# Altium PCB PCB08072018.PcbDoc
Units mm, origin at the board's own origin, x right, y up, seen from the top; angles counter-clockwise.
Board outline 60.25 x 30.25 mm, 4 copper layers (Top Layer, LayerGND, LayerVCC, Bottom Layer), stack 1.49 mm thick; 55 components, 33 nets, 213 pads, 2 vias.
Unrouted connection lines stored in the file: 128.
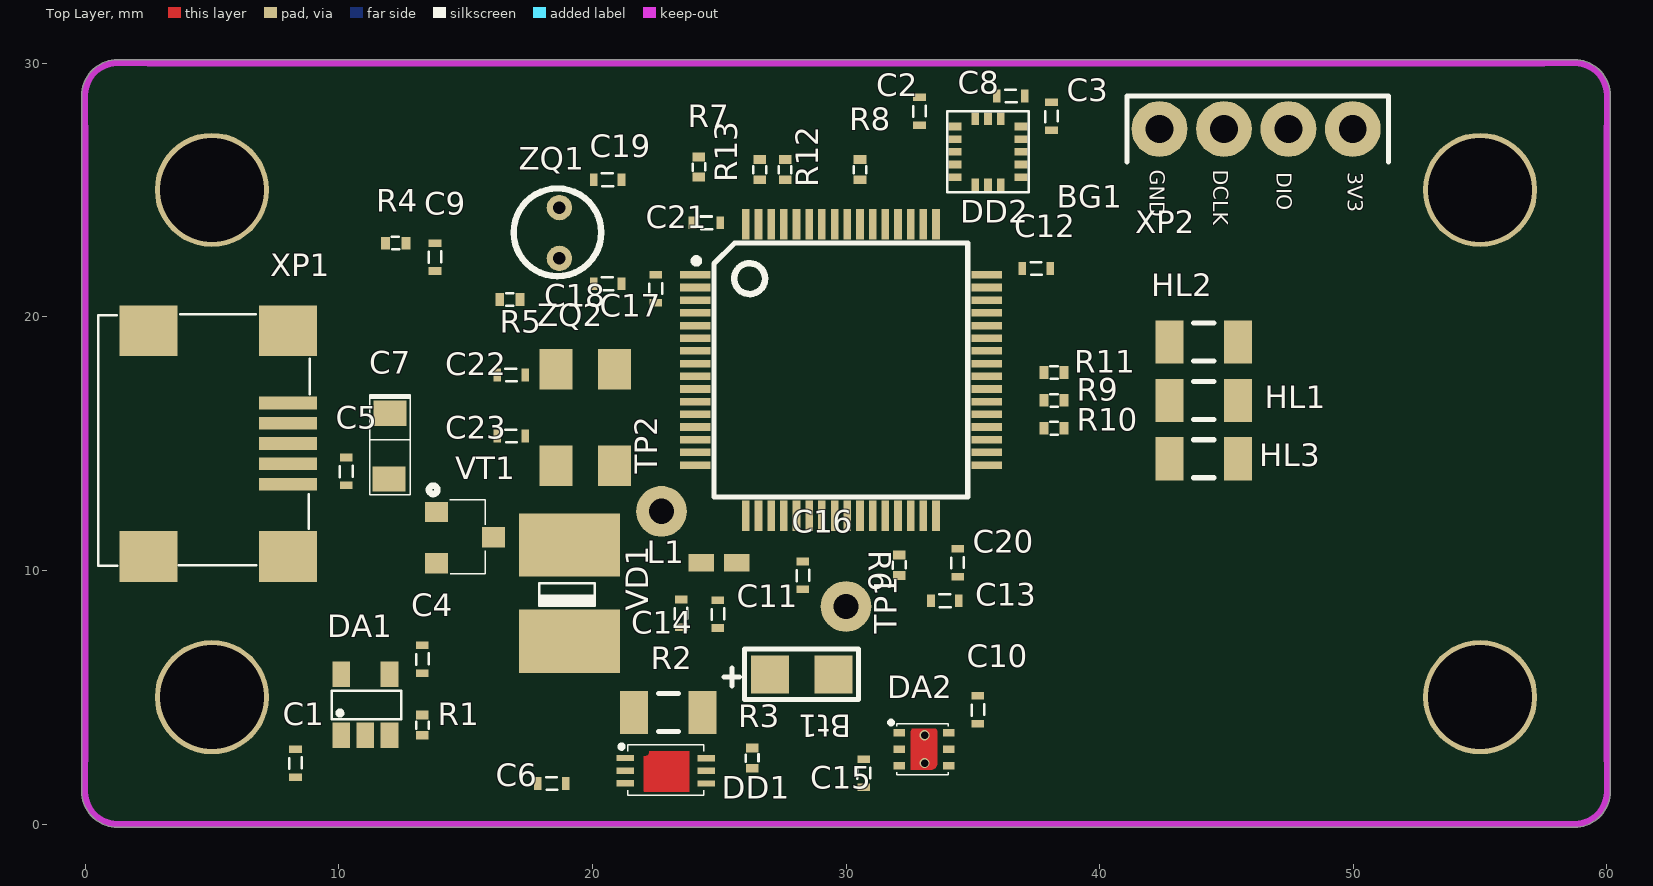
[diagram p0: Top Layer view]
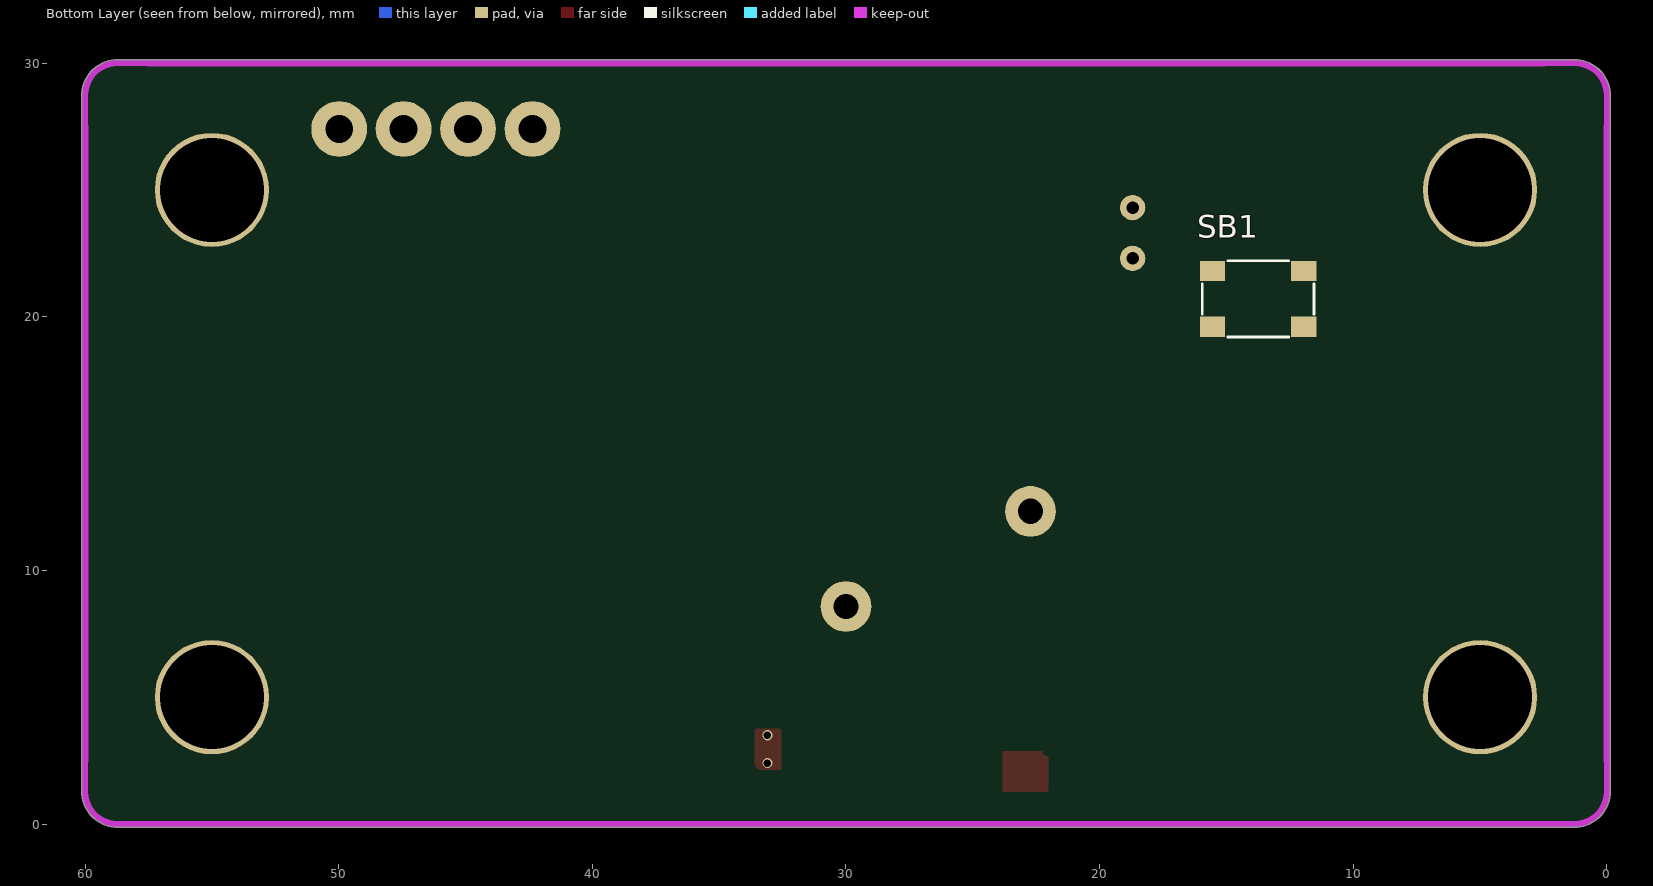
[diagram p1: Bottom Layer view, seen from below]

## Layer stack, top to bottom
Top Solder: solder mask 0.0102, Solder Resist, Dk 3.5
Top Layer: signal copper 0.035
Dielectric 1: prepreg 0.32, FR-4, Dk 4.2
LayerGND: signal copper 0.035
Dielectric 3: core 0.71, Dk 4.2
LayerVCC: signal copper 0.035
Dielectric 2: prepreg 0.32, Dk 4.2
Bottom Layer: signal copper 0.035
Bottom Solder: solder mask 0.0102, Solder Resist, Dk 3.5

## Board outline
-0.125,1.27 -0.125,2.478 cw(c0,2.5) -0.127,2.5 -0.127,27.5 cw(c0,27.5) -0.125,27.522 -0.125,28.73 cw(c1.27,28.73) 1.27,30.125 2.478,30.125 cw(c2.5,30) 2.5,30.127 57.5,30.127 cw(c57.5,30) 57.522,30.125 58.73,30.125 cw(c58.73,28.73) 60.125,28.73 60.125,27.522 cw(c60,27.5) 60.127,27.5 60.127,2.5 cw(c60,2.5) 60.125,2.478 60.125,1.27 cw(c58.73,1.27) 58.73,-0.125 57.522,-0.125 cw(c57.5,0) 57.5,-0.127 2.5,-0.127 cw(c2.5,0) 2.478,-0.125 1.27,-0.125 cw(c1.27,1.27)

## Design rules (kind name [scope] priority, off if disabled: settings)
Clearance [All] p1: gap=0.25 ignorepadtopadclearanceinfootprint=FALSE except(0.2: SMDPad-SMDPad SMDPad-Fill SMDPad-Region)
Clearance Clearance_KeepOut [Keepout] p2: gap=0.75 ignorepadtopadclearanceinfootprint=FALSE
DiffPairsRouting [InDifferentialPair('No Differential Pair')] p1: maxlimit=0.4 minlimit=0.2 mostfreqgap=0.3 toplayer_minwidth=0.3 toplayer_maxwidth=0.5 toplayer_prefwidth=0.35 midlayer1_minwidth=0.3 midlayer1_maxwidth=0.5 midlayer1_prefwidth=0.35 midlayer2_minwidth=0.3 midlayer2_maxwidth=0.5 midlayer2_prefwidth=0.35 bottomlayer_minwidth=0.3 bottomlayer_maxwidth=0.5 bottomlayer_prefwidth=0.35 maxuncoupledlength=12.7
PlaneClearance [All] p1: clearance=0.5
PlaneConnect PlaneConnect__currentLow [InNetClass('Other')] p1: pad.planeconnectstyle=Relief pad.reliefexpansion=0.5 pad.reliefentries=4 pad.reliefconductorwidth=0.35 pad.reliefairgap=0.3 via.planeconnectstyle=Direct via.reliefexpansion=0.508 via.reliefentries=4 via.reliefconductorwidth=0.254 via.reliefairgap=0.254
PlaneConnect [InNetClass('Power')] p2: planeconnectstyle=Direct reliefexpansion=0.508 reliefentries=4 reliefconductorwidth=0.254 reliefairgap=0.254
PolygonConnect PolygonConnect_currentLow [InNetClass('Other')] p1: thpad.connectstyle=Relief thpad.reliefconductorwidth=0.4 thpad.reliefentries=4 thpad.polygonreliefangle="90 Angle" thpad.airgapwidth=0.3 smdpad.connectstyle=Relief smdpad.reliefconductorwidth=0.3 smdpad.reliefentries=4 smdpad.polygonreliefangle="90 Angle" smdpad.airgapwidth=0.3 via.connectstyle=Direct via.reliefconductorwidth=0.254 via.reliefentries=4 via.polygonreliefangle="90 Angle" via.airgapwidth=0.254
PolygonConnect PolygonConnect_Power [InNetClass('Power')] p2: connectstyle=Direct reliefconductorwidth=0.254 reliefentries=4 polygonreliefangle="90 Angle" airgapwidth=0.254
RoutingVias [All] p1: holewidth=0.4 width=0.8 viastyle="Through Hole" minholewidth=0.4 minwidth=0.8 maxholewidth=0.4 maxwidth=0.8
SolderMaskExpansion [All] p1: expansion=0.04
Width [All] p1: maxlimit=5 minlimit=0.3 preferedwidth=0.5
27 further rules are at their usual default settings.

## Classes and differential pairs
net class Power: +3.3V +3.7V +5V AVDD GND
net class Other: Battery_Resourse CHgn GG_Aln INT_LSM6 LED_Power_ON NetBG1_14 NetC4_1 NetC9_2 NetC10_1 NetC13_1 NetDD2_60 NetHL1_1 NetHL2_1 NetHL3_1 OSC32_1 OSC32_2 OSC_IN OSC_OUT RESET SCL_Bat SCL_Sensor SDA_Bat SDA_Sensor SWCLK SWDIO Transmit_Data USART1_RxD USART1_TxD

## Components (designator, comment, footprint, x,y, rotation, side; value= is the part's Value field where it differs from the comment)
BG1 "LSM6DS0" LGA-16 34.3,26.5 r90 top value=16g
Bt1 "X5HW" X5HW 27,5.9 r0 top value="3,7 В 1200 мАч"
C1 "1 uF" CAP0402_min 8.3,2.4 r270 top
C2 "0.1 uF" CAP0402_min 32.9,28.1 r90 top
C3 "10uF" CAP0402_min 38.1,27.9 r270 top
C4 "1 uF" CAP0402_min 13.3,6.5 r270 top
C5 "0.1 uF" CAP0402_min 10.3,13.9 r90 top
C6 "0.1 uF" CAP0402_min 18.4,1.6 r0 top
C7 "4.7u" "Capasitor Tantal TypeA MIN" 12,14.9 r90 top
C8 "0,012uF" CAP0402_min 36.5,28.7 r0 top
C9 "0.1 uF" CAP0402_min 13.8,22.35 r90 top
C10 "4.7u" CAP0402_min 35.2,4.5 r270 top
C11 "0.1 uF" CAP0402_min 24.95,8.275 r270 top
C12 "0.1 uF" CAP0402_min 37.5,21.9 r0 top
C13 "0.1 uF" CAP0402_min 33.9,8.8 r0 top
C14 "0.1 uF" CAP0402_min 23.5,8.3 r270 top
C15 "4.7u" CAP0402_min 30.7,2 r270 top
C16 "0.1 uF" CAP0402_min 28.3,9.8 r90 top
C17 "0.1 uF" CAP0402_min 22.5,21.1 r90 top
C18 "4.3pF" CAP0402_min 20.6,21.3 r180 top
C19 "4.3pF" CAP0402_min 20.6,25.4 r180 top
C20 "0.1 uF" CAP0402_min 34.4,10.3 r270 top
C21 "0.1 uF" CAP0402_min 24.5,23.7 r180 top
C22 "20pF" CAP0402_min 16.8,17.7 r0 top
C23 "20pF" CAP0402_min 16.8,15.3 r0 top
DA1 "MA1555" SOT23-5 10.1,3.5 r0 top
DA2 "TPS78230" WSON-6 32.1,3.6 r270 top value=3V
DD1 "LTC2941IDC" DFN-6 21.3,2.6 r270 top value=5V
DD2 "STM32F401RE" LQFP-64 29.8,17.9 r0 top
HL1 "TO-1608BC-MRE" LED1206 44.1,16.7 r0 top value=RED
HL2 "TO-1608BC-PG" LED1206 44.1,19 r0 top value=GREEN
HL3 "TO-1608BC-MRE" LED1206 44.1,14.4 r0 top value=RED
L1 "220u" LQG15HN15NJ 25,10.3 r180 top
R1 "10k" 0402 13.3,3.5 r90 top
R2 "0.01" 1206 23,4.4 r0 top
R3 "10k" 0402 26.3,3 r270 top
R4 "100" 0402 11.85,22.9 r0 top
R5 "4.7k" 0402 16.35,20.675 r0 top
R6 "4.7k" 0402 32.1,10.6 r270 top
R7 "10k" 0402 24.2,26.3 r270 top
R8 "4.7k" 0402 30.55,25.4 r90 top
R9 "470" 0402 38.6,16.7 r180 top
R10 "470" 0402 38.6,15.6 r180 top
R11 "470" 0402 38.6,17.8 r180 top
R12 "4.7k" 0402 27.6,25.4 r90 top
R13 "4.7k" 0402 26.6,25.4 r90 top
SB1 "IT-1184" IT-1184 13.75,20.7 r0 bottom
TP1 "TP" TP_Hole 30,8.575 r0 top
TP2 "TP" TP_Hole 22.725,12.325 r0 top
VD1 "SK24" DO-214(SMB) 19.1,11 r270 top value=2A,40V
VT1 "IRLML6402TRPBF" SOT23-3 13.85,12.3 r270 top value=-20V,0,065Om
XP1 "USB/M-1J" USB/M-1J 8,15 r90 top
XP2 "DS-1021-1x4" Connector_STKLink 49.98,27.4 r180 top value=100V
ZQ1 "32768 Hz" KX-26 18.725,22.225 r90 top
ZQ2 "8MHz" SMD0503 18.575,17.925 r270 top

## Footprints (in the part's own frame and the unit in brackets; to place one, negate y for a bottom-side part, rotate by r counter-clockwise, add the part's x,y. Pads: shape width x height; smd on the part's side, far side on the other; paste and mask are expansions set on the pad)
0402 [mm]
  rect 0.35x0.5 smd mask+0.07: 1(0,0) 2(0.8,0)
  silkscreen extent 0.25,-0.25 0.54,0.25, body extent -0.1,-0.25 0.9,0.25, height 0.25
1206 [mm]
  rect 1.1x1.7 smd: 1(-1.35,0) 2(1.35,0)
  silkscreen extent -0.4,-0.75 0.4,0.75, body extent -1.55,-0.83 1.55,0.83, height 0.67
CAP0402_min [mm]
  rect 0.3x0.5 smd mask+0.07: 1(-0.55,0) 2(0.55,0)
  silkscreen extent -0.23,-0.25 0.23,0.25, body extent -0.73,-0.25 0.73,0.25, height 0.51
"Capasitor Tantal TypeA MIN" [mm]
  rect 1x1.3 smd: 1(-1.3,0.025) 2(1.3,-0.025)
  silkscreen extent -1.92,-0.83 2.03,0.77, body extent -1.6,-0.83 1.6,0.78, height 1.61
Connector_STKLink [mm]
  round 2.2 hole 1.1: 1(0,0) 2(2.54,0) 3(5.08,0) 4(7.62,0)
  silkscreen extent -1.4,-1.3 8.9,1.3, body extent -1.24,-1.3 8.92,1.24, height 8.54
DFN-6 [mm] "2mmx3mm"
  rect 0.25x0.7 smd: 1(0,0) 2(0.5,0) 3(1,0) 4(1.002,3.194) 5(0.502,3.194) 6(0.002,3.194)
  Top Layer region: -0.25,1.004 1.299,1.004 1.299,2.504 -0.25,2.504
  Top Layer region: 1.249,0.729 1.238,0.732 1.229,0.739 1.224,0.749 1.224,0.76 1.229,0.77 1.238,0.777 1.249,0.78 1.249,0.78 1.299,0.78 1.309,0.778 1.317,0.772 1.322,0.764 1.324,0.754 1.324,0.754 1.322,0.745 1.317,0.736 1.309,0.731 1.299,0.729 1.299,0.729
  Top Layer region: -0.025,0.775 -0.042,0.861 -0.091,0.934 -0.164,0.983 -0.25,1 -0.25,1 -0.261,0.998 -0.27,0.991 -0.275,0.981 -0.275,0.969 -0.27,0.959 -0.261,0.952 -0.25,0.95 -0.25,0.95 -0.183,0.936 -0.127,0.898 -0.089,0.842 -0.075,0.775 -0.075,0.775 -0.076,0.766 -0.076,0.757 -0.076,0.757 -0.075,0.746 -0.069,0.736 -0.059,0.73 -0.048,0.729 -0.037,0.733 -0.029,0.741 -0.026,0.752 -0.026,0.752 -0.025,0.763 -0.025,0.775
  Top Layer region: -0.25,2.479 -0.261,2.482 -0.27,2.489 -0.275,2.499 -0.275,2.51 -0.27,2.52 -0.261,2.527 -0.25,2.53 -0.25,2.53 1.299,2.53 1.309,2.528 1.317,2.522 1.322,2.514 1.324,2.504 1.324,2.504 1.322,2.495 1.317,2.486 1.309,2.481 1.299,2.479 1.299,2.479
  Top Layer region: -0.275,0.975 -0.275,2.504 -0.273,2.515 -0.266,2.524 -0.256,2.529 -0.244,2.529 -0.234,2.524 -0.227,2.515 -0.225,2.504 -0.225,2.504 -0.225,0.975 -0.227,0.964 -0.234,0.955 -0.244,0.95 -0.256,0.95 -0.266,0.955 -0.273,0.964 -0.275,0.975
  Top Layer region: 1.274,0.754 1.276,0.743 1.283,0.735 1.293,0.73 1.305,0.73 1.315,0.735 1.322,0.743 1.324,0.754 1.324,0.754 1.324,2.504 1.322,2.515 1.315,2.524 1.305,2.529 1.293,2.529 1.283,2.524 1.276,2.515 1.274,2.504 1.274,2.504
  Top Layer region: -0.051,0.729 -0.062,0.732 -0.071,0.739 -0.076,0.749 -0.076,0.76 -0.071,0.77 -0.062,0.777 -0.051,0.78 -0.051,0.78 1.249,0.78 1.259,0.778 1.267,0.772 1.272,0.764 1.274,0.754 1.274,0.754 1.272,0.745 1.267,0.736 1.259,0.731 1.249,0.729 1.249,0.729
  Top Layer region: -0.25,1.004 1.299,1.004 1.299,0.754 1.299,0.754 -0.051,0.754 -0.051,0.844 -0.058,0.877 -0.076,0.904 -0.076,0.904
  silkscreen extent -0.53,-0.19 1.48,3.1, body extent -0.52,0.1 1.48,3.1, height 0.8
DO-214(SMB) [mm]
  rect 2.5x4 smd: 1(0,0) 2(3.8,0)
  silkscreen extent 1.5,-1.2 2.4,1, body extent -0.8,-1.9 4.6,1.7, height 2.3
IT-1184 [mm] "3x3x1.5"
  rect 1x0.8 smd: 1(-1.8,1.1) 2(1.8,1.1) 3(-1.8,-1.1) 4(1.8,-1.1)
  silkscreen extent -2.2,-1.5 2.2,1.5, body extent -2,-1.25 2,1.25, height 1.4
KX-26 [mm]
  round 1 hole 0.5: 1(0.075,0.025) 3(2.075,0.025)
  silkscreen extent -0.63,-1.63 2.83,1.83, body extent -0.07,-0.08 2.23,8.27, height 2.95
LED1206 [mm]
  rect 1.1x1.7 smd: 1(-1.35,0) 2(1.35,0)
  silkscreen extent -0.4,-0.75 0.4,0.75, body extent -1.6,-0.8 1.6,0.8, height 1.1
LGA-16 [mm]
  rect 0.3x0.5 smd mask+0.075: 1(1,0) 2(0.5,0) 3(0,0) 4(-0.5,0) 5(-1,0) 9(-1,-2.6) 10(-0.5,-2.6) 11(0,-2.6) 12(0.5,-2.6) 13(1,-2.6)
  rect 0.5x0.3 smd mask+0.075: 6(-1.3,-0.8) 7(-1.3,-1.3) 8(-1.3,-1.8) 14(1.3,-1.8) 15(1.3,-1.3) 16(1.3,-0.8)
  silkscreen extent -1.6,-2.9 1.6,0.3, body extent -1.5,-2.8 1.5,0.2, height 1.01
LQFP-64 [mm] "LQFP, 64-Leads, Body 10,30x10,30mm, Pitch 0,50mm, IPC Medium Density"
  rect 1.2x0.3 smd mask+0.075: 1(-5.75,3.75) 2(-5.75,3.25) 3(-5.75,2.75) 4(-5.75,2.25) 5(-5.75,1.75) 6(-5.75,1.25) 7(-5.75,0.75) 8(-5.75,0.25) 9(-5.75,-0.25) 10(-5.75,-0.75) 11(-5.75,-1.25) 12(-5.75,-1.75) 13(-5.75,-2.25) 14(-5.75,-2.75) 15(-5.75,-3.25) 16(-5.75,-3.75) 33(5.75,-3.75) 34(5.75,-3.25) 35(5.75,-2.75) 36(5.75,-2.25) 37(5.75,-1.75) 38(5.75,-1.25) 39(5.75,-0.75) 40(5.75,-0.25) 41(5.75,0.25) 42(5.75,0.75) 43(5.75,1.25) 44(5.75,1.75) 45(5.75,2.25) 46(5.75,2.75) 47(5.75,3.25) 48(5.75,3.75)
  rect 0.3x1.2 smd mask+0.075: 17(-3.75,-5.75) 18(-3.25,-5.75) 19(-2.75,-5.75) 20(-2.25,-5.75) 21(-1.75,-5.75) 22(-1.25,-5.75) 23(-0.75,-5.75) 24(-0.25,-5.75) 25(0.25,-5.75) 26(0.75,-5.75) 27(1.25,-5.75) 28(1.75,-5.75) 29(2.25,-5.75) 30(2.75,-5.75) 31(3.25,-5.75) 32(3.75,-5.75) 49(3.75,5.75) 50(3.25,5.75) 51(2.75,5.75) 52(2.25,5.75) 53(1.75,5.75) 54(1.25,5.75) 55(0.75,5.75) 56(0.25,5.75) 57(-0.25,5.75) 58(-0.75,5.75) 59(-1.25,5.75) 60(-1.75,5.75) 61(-2.25,5.75) 62(-2.75,5.75) 63(-3.25,5.75) 64(-3.75,5.75)
  silkscreen extent -5.8,-5 5,5, body extent -5.89,-5.89 5.89,5.89, height 1.55
LQG15HN15NJ [mm]
  rect 1x0.7 smd: 1(-0.7,0) 2(0.7,0)
  body extent -0.73,-0.25 0.73,0.25, height 0.51
SMD0503 [mm]
  rect 1.6x1.3 smd: 1(0,0) 2(3.8,0) 3(3.8,2.3) 4(0,2.3)
  body extent 0.39,-0.08 3.61,2.42, height 0.81
SOT23-3 [mm]
  rect 0.8x0.9 smd mask+0.07: 1(0,0) 2(2.025,0) 3(1,2.25)
  silkscreen extent -1.04,-0.29 2.42,1.92, body extent -0.48,-0.05 2.44,2.43, height 1
SOT23-5 [mm]
  rect 0.7x1 smd mask+0.05: 1(0,0) 2(0.95,0) 3(1.9,0) 4(1.9,2.4) 5(0,2.4)
  silkscreen extent -0.38,0.63 2.37,1.75, body extent -0.5,-0.05 2.5,2.45, height 1.05
TP_Hole [mm]
  round 2 hole 1: 1(0,0)
USB/M-1J [mm]
  rect 0.5x2.3 smd mask+0.05: 1(-1.6,0) 2(-0.8,0) 3(0,0) 4(0.8,0) 5(1.6,0)
  rect 2x2.3 smd mask+0.05: -(-4.45,0) -(-4.45,5.5) -(4.45,0) -(4.45,5.5)
  silkscreen extent -4.82,-0.85 5.1,7.47, body extent -4.8,-0.82 5.1,8.42, height 3.93
WSON-6 [mm]
  rect 0.3x0.45 smd mask+0.07: 1(0,0) 2(0.65,0) 3(1.3,0) 4(1.3,1.95) 5(0.65,1.95) 6(0,1.95)
  Top Layer region: -0.062,0.45 -0.107,0.487 -0.162,0.5 -0.162,0.5 -0.162,1.375 -0.146,1.438 -0.1,1.483 -0.037,1.5 -0.037,1.5 1.227,1.5 1.345,1.468 1.431,1.381 1.463,1.262 1.463,1.262 1.462,0.45
  silkscreen extent -0.42,-0.35 1.65,1.92, body extent -0.35,-0.1 1.65,1.92, height 0.8
X5HW [mm]
  rect 1.5x1.5 smd: 1(0,0) 2(2.5,0)
  silkscreen extent -1.8,-1 3.5,1

## Part data
BG1: "IMEMO", Manufacture=STMMicroElectronics, Package=LGA-16, Documentation=https://www.st.com/resource/en/datasheet/lsm6ds0.pdf, Part Number=LSM6DS0, Price=4,5, Quantity=10, ShoppingPlace=https://ru.aliexpress.com/store/product/Free-shipping-10PCS-LSM6DS0TR-LGA-16-LSM6DS0-new-chip-IC-best-quality/1749123_32483761173.html?aff_platform=link-c-tool&cpt=1531246783362&sk=ZjmAemm&aff_trace_key=8a7dd90f83b244d7b563d2b9fb293d25-1531246783362-08030-ZjmAemm&terminal_id=636778b2a25b45858895bbc6c5ce3b1a
Bt1: Manufacturer=china, Package=smd, Part Number=2025, Price=5, Quantity=https://ru.aliexpress.com/item/3-7-1200-Lipo/32852574199.html?spm=a2g0v.search0604.3.181.2111fc08nULavV&ws_ab_test=searchweb0_0%2Csearchweb201602_3_10152_10151_10065_10344_10068_10342_10343_10340_10341_10696_10084_5722520_10083_5711520_10618_10307_10059_5722620_5722920_306_5722720_5722820_100031_5711420_10103_10624_10623_10622_10621_10620_10125%2Csearchweb201603_31%2CppcSwitch_5&algo_expid=a7204690-5c98-48fe-b8bb-b8922ec76835-26&algo_pvid=a7204690-5c98-48fe-b8bb-b8922ec76835&transAbTest=ae803_2&priceBeautifyAB=0, ShoppingPlace=https://ru.aliexpress.com/item/1Pcs-3-7V-800mAh-Battery-for-Drone-For-x5c-x5sw-x5-L15-RC-Quadcopter-Pro-Accessories/32853787962.html?spm=a2g0v.search0604.3.56.7e86fc08nuVnEH&ws_ab_test=searchweb0_0,searchweb201602_3_10846_10152_10065_10151_10344_10068_10342_10343_10340_10059_10341_10696_100031_10084_10083_10103_524_10618_10624_10307_10623_10622_10621_10620,searchweb201603_2,ppcSwitch_5&algo_expid=3f134381-0cd0-46b3-8018-4341e1aaa5ba-8&algo_pvid=3f134381-0cd0-46b3-8018-4341e1aaa5ba&transAbTest=ae803_2&priceBeautifyAB=0
C1 C4: library part Capasitor, Manufacturer="Murata Manufacturing", Package=0402, Part Number=GRM155R61A105KE15B, Voltage=10V, Price=0,035, Quantity=50, ShoppingPlace=https://www.ru-chipdip.by/product/grm155r61a105k
C2 C5 C6 C9 C11 C12 C13 C14 C16 C17 C20 C21: library part Capasitor, Manufacturer=TDK, Package=0402, Part Number=C1005X7R1H104KT000F, Voltage=50V, Price=0,15, Quantity=50, ShoppingPlace=http://belchip.by/product/?selected_product=33981
C3: library part Capasitor, Manufacturer="Murata Manufacturing", Package=0402, Part Number=GRM1535C1H100J, Voltage=50V, Price=0,02, Quantity=50, ShoppingPlace=https://www.ru-chipdip.by/product/grm1535c1h100j
C7: library part "Capasitor Electrolit", Manufacturer=China, Package="Type A", Part Number=TECAP4.7/16VA10, Power=16V, Price=0.16, ShoppingPlace=https://www.ru-chipdip.by/product0/850917081
C8: library part Capasitor, Manufacturer="Murata Manufacturing", Package=0402, Part Number=GRM155R71H123K, Voltage=50V, Price=0,02, Quantity=50, ShoppingPlace=https://www.ru-chipdip.by/product/grm155r71h123k
C10 C15: library part Capasitor, Manufacturer="Murata Manufacturing", Package=0402, Part Number=GRM2165C1H4R7CD01D, Voltage=50V, Price=0,035, Quantity=50, ShoppingPlace=https://www.ru-chipdip.by/product/grm2165c1h4r7c
C18 C19: library part Capasitor, Manufacturer=Samsung, Package=0402, Part Number=CL05C4R7BB5NNNC, Voltage=50V, Price=0,15, Quantity=50, ShoppingPlace=http://belchip.by/product/?selected_product=18863
C22 C23: library part Capasitor, Manufacturer=Samsung, Package=0402, Part Number=CL05C220JB5NNNC, Voltage=50V, Price=0,15, Quantity=50, ShoppingPlace=http://belchip.by/product/?selected_product=18843
DA1: library part MAX1555, Manufacturer="Maxim Integrated Products", Package=SOT-23-5, Part Number=MAX1555EZK+T, Price=1, Quantity=1, ShoppingPlace=http://belchip.by/product/?selected_product=06393
DA2: Manufacturer="Texas Instruments", Package=SOT-23-6, Part Number=TSOT23-5, Price=1.58, Quantity=1, ShoppingPlace=https://www.digikey.com/product-detail/en/texas-instruments/TPS78230DDCR/296-24372-2-ND/2051745
DD1: Manufacturer="RoHS Compliant", Package=6-DFN, Part Number=LTC2941IDC, Price=1.58, Quantity=1, ShoppingPlace=https://www.digikey.com/product-detail/en/linear-technology-analog-devices/LTC1754ES6-5-TRMPBF/LTC1754ES6-5-TRMPBFTR-ND/962607
DD2: Manufacturer="STM MicroElectronics", Documentation=http://www.keil.com/dd/docs/datashts/st/stm32f4xx/dm00102166.pdf, Part Number=STM32F401RE, Price=12, Quantity=1
HL1 HL3: library part LED, Manufacturer="Taiwan Oasis Technology Co", Package=1608, Part Number=TO-1608BC-MRE, Price=0.03, Quantity=10, Shopping Place=https://www.ru-chipdip.by/product/to-1608bc-mre
HL2: library part LED, Manufacturer="Taiwan Oasis Technology", Package=1608, Part Number=TO-1608BC-PG, Price=0.03, Quantity=10, Shopping Place=https://www.ru-chipdip.by/product/to-1608bc-pg
L1: library part Inductor, Manufacturer=Bourns, Package=1812, Part Number=CM453232-221KL, Price=0.225, Quantity=2, ShoppingPlace=https://www.ru-chipdip.by/product/cm453232-221kl
R1 R3 R7: library part Resistor, Manufacturer=Тайвань, Package=0402, Part Number=RC0402FR-0710KL, Power=0.062W, Price=0,015, Quntity=50
R2: library part Resistor, Manufacturer=China, Package=1206, Part Number=120600R1, Power=0.75W, Price=4, Quntity=50, ShoppingPlace=https://ru.aliexpress.com/item/Power-Adapter-Chip-Resistors-1206-0-01R-0-01-ohms-R010-100pcs/32834259073.html?spm=a2g0v.search0604.3.249.2a2b60c7NBGyXV&ws_ab_test=searchweb0_0,searchweb201602_3_10152_10151_10065_10344_10068_10342_10343_10340_10341_10696_10084_5722520_10083_5711520_10618_10307_10059_5722620_5722920_5722720_5722820_100031_5711420_10103_524_10624_10623_10622_10621_10620_10125,searchweb201603_6,ppcSwitch_5&algo_expid=fa6d5ed5-cdca-4e44-a6e1-815c4b4f7787-37&algo_pvid=fa6d5ed5-cdca-4e44-a6e1-815c4b4f7787&transAbTest=ae803_2&priceBeautifyAB=0
R4: library part Resistor, Manufacturer=Тайвань, Package=0402, Part Number=RC0603FR-07100RL, Power=0.062W, Price=0.03, Quntity=50, ShoppingPlace=https://www.ru-chipdip.by/product0/9000079616
R5 R6 R8 R12 R13: library part Resistor, Manufacturer=Тайвань, Package=0402, Part Number=RC0402JR-074K7L, Power=0.062W, Price=0.03, Quntity=50, ShoppingPlace=https://www.ru-chipdip.by/product0/9000189640
R9 R10 R11: library part Resistor, Manufacturer=Тайвань, Package=0402, Part Number=RC0805FR-07470RL, Power=0,062W, Price=0,015, Quntity=50, ShoppingPlace=https://www.ru-chipdip.by/product0/9000079478
SB1: library part Button, Manufacturer=China, Package=IT-1184, Part Number=IT-1184, Price=2, Quantity=5, ShoppingPlace=https://www.chipdip.ru/product/it-1184-smd
VD1: library part Basic_Diode_shottki, Package=SMB, Power=80W, Documantation=http://belchip.by/sitedocs/28813.pdf, Part Number=SK24, Price=0,11, Quantity=1, ShoppingPlace=http://belchip.by/product/?selected_product=28813
VT1: library part IRLML6402, Manufacturer="International rectifier", Package=SOT-23, Documentation=https://www.infineon.com/dgdl/irlml6402pbf.pdf?fileId=5546d462533600a401535668d5c2263c, Part Number=IRLML6402TRPBF, Price=0,17, Quantity=1
XP1: library part USB-M-1J, Manufacturer=ESB, Package="ESB 22 SERIES", Part Number=USB/M-1J, Price=2, Quantity=1, ShoppingPlace=http://belchip.by/product/?selected_product=07369
XP2: library part Connector_STKLink, Manufacturer="Ningbo connfly electronic", Package=DS-1021, Part Number=DS-1021-1x4, Price=0,09, Quantity=10, ShoppingPlace=https://www.ru-chipdip.by/product/pls-4
ZQ1: library part Rzanator, Manufacturer=CHina, Package=KX-26, Part Number=KX-26, Price=1, Quantity=1, ShoppingPlace=http://belchip.by/product/?selected_product=18329
ZQ2: library part Rzanator, Manufacturer=CHina, Package=SMD0503, Part Number=SMD0503(4P), Price=0.6, Quantity=1, ShoppingPlace=https://www.ru-chipdip.by/product0/9000341671

## Free pads (board coordinates)
  round 4.5 hole 4.1: M(5,5) M(5,25) M(55,5) M(55,25)

## Via types
v1: diameter 0.4, hole 0.3, Top Layer to Bottom Layer, tented both sides, 2 vias

## Nets (pads, with @x,y where several pads share a name; then routed paths per layer and width w, separated by ;. In a path a pad name is that pad's centre, name@x,y a point inside that pad or via, vN(x,y) a via of type N, cw(c..) or ccw(c..) an arc to the next point about the centre after c; other vN are vias at no path point)
+3.3V: BG1.1 BG1.4 BG1.5 BG1.16 C2.1 C3.1 C11.1 C12.1 C15.1 C16.2 C17.2 C20.1 C21.1 DA2.1 DD2.1 DD2.19 DD2.32 DD2.48 DD2.64 L1.1 R1.2 R3.1 R5.2 R6.2 R8.2 R12.2 R13.2 XP2.1
+3.7V: Bt1.1 DD1.6 R2.2
+5V: C1.1 C5.1 C7.1 DA1.1 VD1.1 VT1.1 XP1.1
AVDD: C14.1 DD2.13 L1.2
Battery_Resourse: DD2.39 R9.2
CHgn: DA1.3 DD2.45 R1.1
GG_Aln: DD1.5 R3.2
GND: BG1.8 BG1.9 BG1.10 BG1.11 BG1.12 BG1.13 BG1.15 Bt1.2 C1.2 C2.2 C3.2 C4.2 C5.2 C6.2 C7.2 C8.2 C10.2 C11.2 C12.2 C13.2 C14.2 C15.2 C16.1 C17.1 C18.1 C19.1 C20.2 C21.2 C22.1 C23.1 DA1.2 DA2.3 DA2.5 DD1.2 DD2.12 DD2.18 DD2.31 DD2.47 DD2.63 HL1.2 HL2.2 HL3.2 R4.1 R7.1 SB1.1 XP1.5 XP2.4
INT_LSM6: BG1.7 DD2.8
LED_Power_ON: DD2.40 R11.2
NetBG1_14: BG1.14 C8.1
NetC4_1: C4.1 C6.1 DA1.5 DD1.1 R2.1 VT1.2
NetC9_2: C9.2 R4.2
NetC10_1: C10.1 DA2.6 VD1.2 VT1.3
NetC13_1: C13.1 DD2.30
NetDD2_60: DD2.60 R7.2
NetHL1_1: HL1.1 R9.1
NetHL2_1: HL2.1 R11.1
NetHL3_1: HL3.1 R10.1
OSC32_1: C18.2 DD2.3 ZQ1.1
OSC32_2: C19.2 DD2.4 ZQ1.3
OSC_IN: C22.2 DD2.5 ZQ2.1
OSC_OUT: C23.2 DD2.6 ZQ2.3
RESET: C9.1 DD2.7 R5.1 SB1.4
SCL_Bat: DD1.3 DD2.29 R6.1
SCL_Sensor: BG1.2 DD2.61 R12.1
SDA_Bat: DD1.4 DD2.55 R8.1
SDA_Sensor: BG1.3 DD2.62 R13.1
SWCLK: DD2.49 XP2.3
SWDIO: DD2.46 XP2.2
Transmit_Data: DD2.38 R10.2
USART1_RxD: DD2.16 TP2.1
USART1_TxD: DD2.17 TP1.1
pads on no net: BG1.6 DA1.4 DA2.2 DA2.4 DD2.2 DD2.9 DD2.10 DD2.11 DD2.14 DD2.15 DD2.20 DD2.21 DD2.22 DD2.23 DD2.24 DD2.25 DD2.26 DD2.27 DD2.28 DD2.33 DD2.34 DD2.35 DD2.36 DD2.37 DD2.41 DD2.42 DD2.43 DD2.44 DD2.50 DD2.51 DD2.52 DD2.53 DD2.54 DD2.56 DD2.57 DD2.58 DD2.59 SB1.2 SB1.3 XP1.2 XP1.3 XP1.4 XP1.- ZQ2.2 ZQ2.4
copper on no net:
  other v1: 33.1,2.4 33.1,3.5

## Keep-outs
Keep-Out Layer:
  lines w0.25: 0,2.5 0,1.27 ccw(c1.27,1.27) 1.27,0 2.5,0 ; 0,27.5 0,28.73 cw(c1.27,28.73) 1.27,30 2.5,30 ; 57.5,0 58.73,0 ccw(c58.73,1.27) 60,1.27 60,2.5 ; 57.5,30 58.73,30 cw(c58.73,28.73) 60,28.73 60,27.5
  lines w0.254: 0,2.5 0,27.5 ; 2.5,0 57.5,0 ; 2.5,30 57.5,30 ; 60,2.5 60,27.5

## Silkscreen, mask and mechanical layers (free items; w line width, h text height)
Board:
  lines w0.25: 0,2.5 0,1.27 ccw(c1.27,1.27) 1.27,0 2.5,0 ; 0,27.5 0,28.73 cw(c1.27,28.73) 1.27,30 2.5,30 ; 57.5,0 58.73,0 ccw(c58.73,1.27) 60,1.27 60,2.5 ; 57.5,30 58.73,30 cw(c58.73,28.73) 60,28.73 60,27.5
  lines w0.254: 0,2.5 0,27.5 ; 2.5,0 57.5,0 ; 2.5,30 57.5,30 ; 60,2.5 60,27.5

## Dimensions
59.5,0 to 59.5,30 on Size
0,25 to 60,30 on Size

## Text inside footprints (layer, text, board x,y; h text height)
XP2: Top Overlay "GND" at 41.78,25.8 h1 r270; Top Overlay "DCLK" at 44.28,25.8 h1 r270; Top Overlay "DIO" at 46.78,25.7 h1 r270; Top Overlay "3V3" at 49.58,25.7 h1 r270